# EAGLE board keyBoard_B (EAGLE 6.3), part 1 of 2
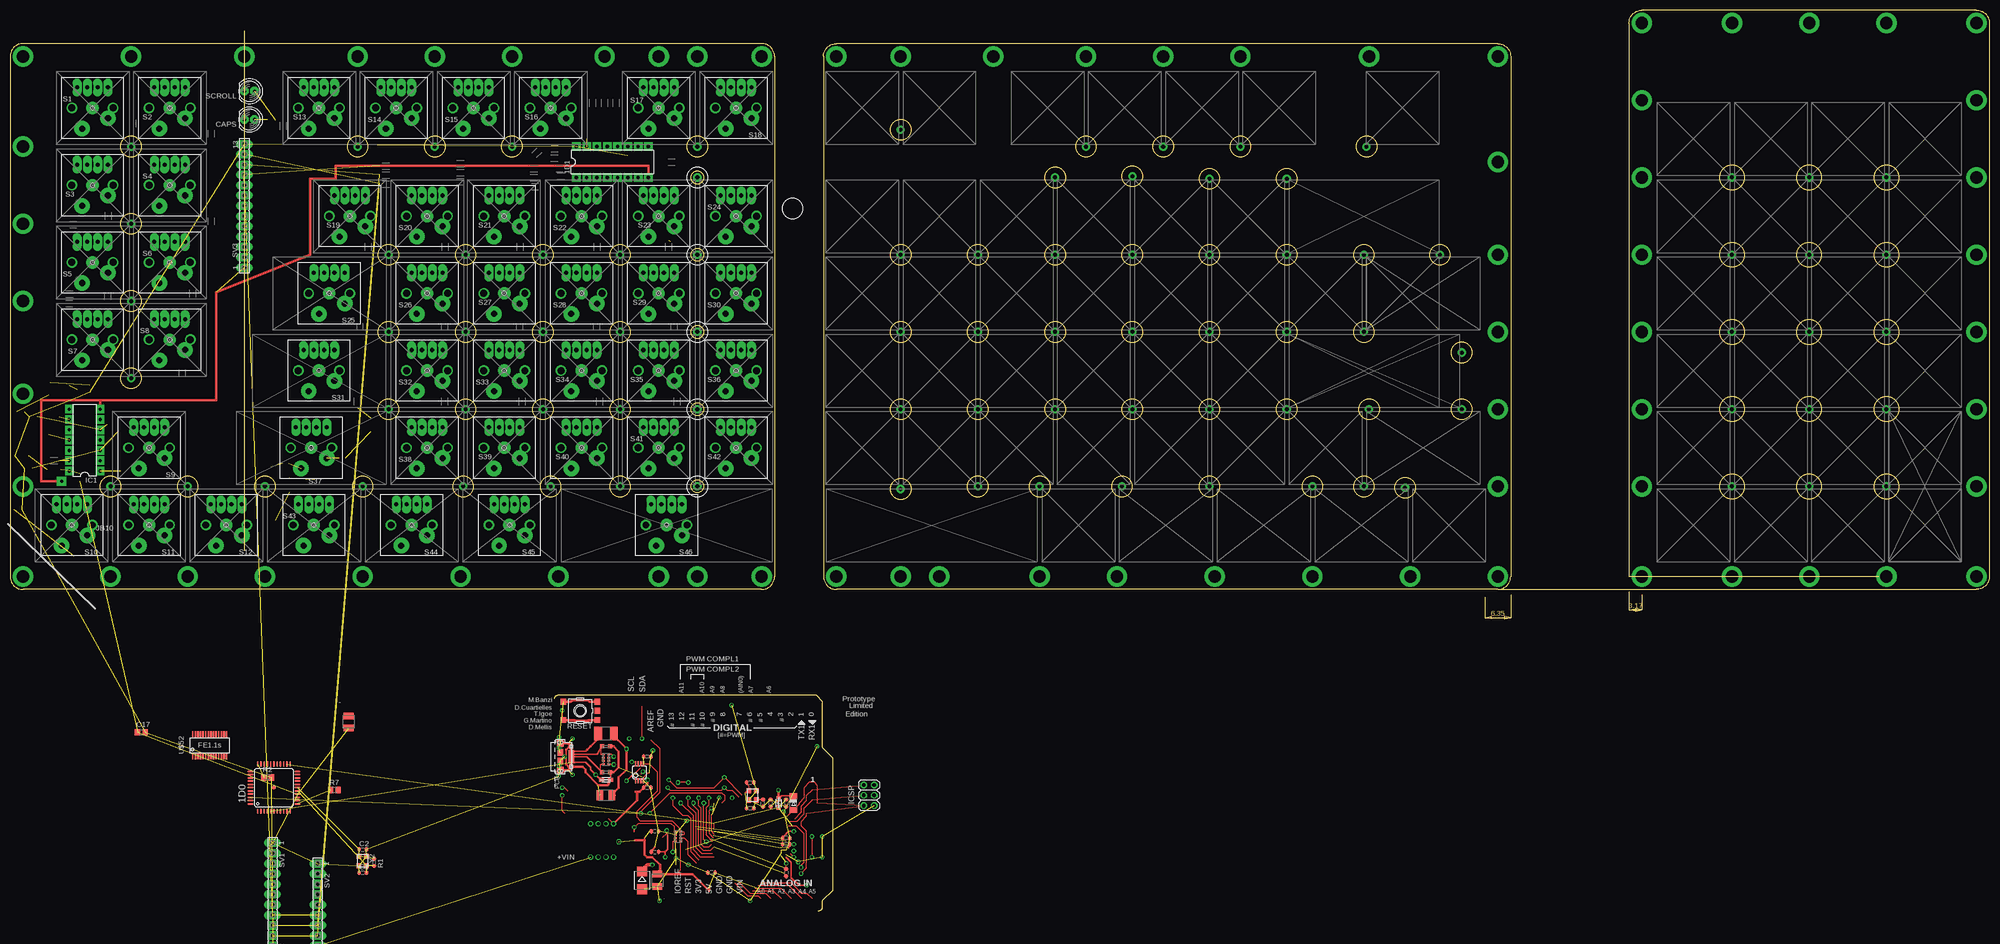
[diagram p0: board, top side]
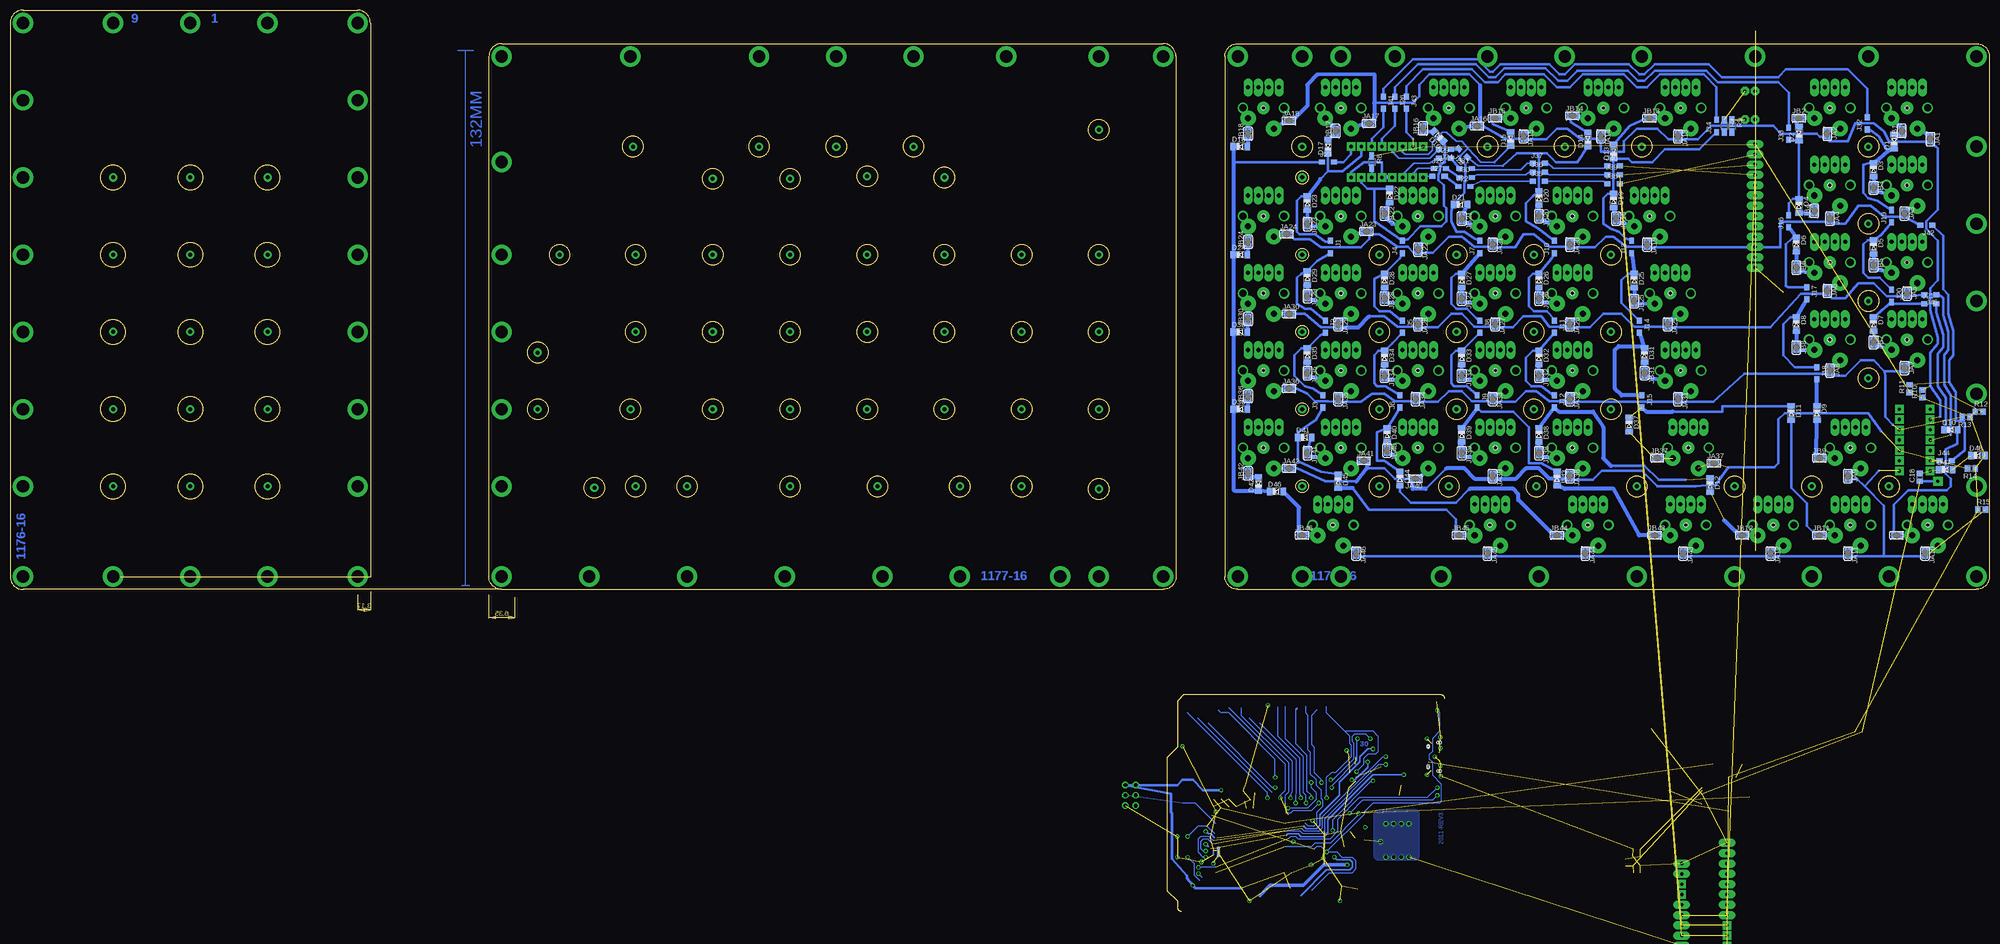
[diagram p1: board, bottom side, seen from below]

Size 488.31 x 222.25 mm. Coordinates in mm from the lower left corner, seen from the top.
Outline: 367.03,79.38 485.14,79.38 arc90 488.31,82.55 488.31,219.07 arc90 485.14,222.25 402.59,222.25 arc90 399.42,219.07 399.42,82.55 461.01,82.55
Outline: 367.03,79.38 203.84,79.38 arc-90 200.66,82.55 200.66,210.82 arc-90 203.84,214 367.03,214 arc-90 370.2,210.82 370.2,82.55 arc-90 367.03,79.38
Outline: 199.34,0 arc90 200.34,1 200.34,2.54 202.88,5.08 202.88,37.85 200.34,40.39 200.34,51.82 198.82,53.34 135.3,53.34 arc90 134.3,52.34
Outline: 57.78,217.17 57.78,88.9
Outline: 188.59,210.82 188.59,82.55 arc-90 185.42,79.38 3.17,79.38 arc-90 0,82.55 0,210.82 arc-90 3.17,214 185.42,214 arc-90 188.59,210.82
Outline: circle at 462.92,104.77 radius 3
Outline: circle at 462.92,180.97 radius 3
Outline: circle at 424.81,123.82 radius 3
Outline: circle at 443.87,123.82 radius 3
Outline: circle at 443.87,104.77 radius 3
Outline: circle at 424.81,104.77 radius 3
Outline: circle at 424.81,142.88 radius 3
Outline: circle at 424.81,161.93 radius 3
Outline: circle at 462.92,123.82 radius 3
Outline: circle at 462.92,142.88 radius 3
Outline: circle at 462.92,161.93 radius 3
Outline: circle at 443.87,161.93 radius 3
Outline: circle at 443.87,180.97 radius 3
Outline: circle at 424.81,180.97 radius 3
Outline: circle at 443.87,142.88 radius 3
Outline: circle at 219.71,161.93 radius 2.5
Outline: circle at 238.76,161.93 radius 2.5
Outline: circle at 257.81,161.93 radius 2.5
Outline: circle at 219.71,142.88 radius 2.5
Outline: circle at 238.76,142.88 radius 2.5
Copper layers (1*16): Top 0.035mm / dielectric 1.5mm / Bottom 0.035mm
Design rules "default": minimum track width 10mil, minimum drill 24mil, track to track 8mil, track to pad 8mil, pad to pad 8mil, via to via 8mil, smd to smd 8mil, copper to edge 40mil, drill to drill 8mil, minimum pad ring 10mil, minimum via ring 8mil, stop-mask expansion 4mil, vias tented up to drill 0mil, thermal gap 10mil
Net classes: 0 default: width 0.254 mm, drill 0.61 mm, clearance 0.254 mm; 1 power: width 0.254 mm, drill 0.61 mm, clearance 0.254 mm; 2 gnd: width 0.254 mm, drill 0.61 mm, clearance 0.254 mm; 3 usbvcc: width 0.254 mm, drill 0.61 mm, clearance 0.254 mm; 4 aref: width 0.254 mm, drill 0.61 mm, clearance 0.254 mm
vRestrict: area 238.8,-19.2 to 239.3,-18.9; area 232,-22.6 to 232.7,-22.1; area 240.7,-22.6 to 241.4,-22.1; area 237.5,-22.6 to 238,-22.1; area 244.1,-47.5 to 244.7,-47; area 246.6,-47.6 to 247.1,-46.7

## Footprints (pad centres in the part's own frame; a part is rotated, then mirrored left to right if it is on the bottom)
SMARTPRJ_TQFP44-PAD = smd 1.4 x 0.45: 1 -5.8,4; 2 -5.8,3.2; 3 -5.8,2.4; 4 -5.8,1.6; 5 -5.8,0.8; 6 -5.8,0; 7 -5.8,-0.8; 8 -5.8,-1.6; 9 -5.8,-2.4; 10 -5.8,-3.2; 11 -5.8,-4; 23 5.8,-4; 24 5.8,-3.2; 25 5.8,-2.4; 26 5.8,-1.6; 27 5.8,-0.8; 28 5.8,0; 29 5.8,0.8; 30 5.8,1.6; 31 5.8,2.4; 32 5.8,3.2; 33 5.8,4 | smd 0.45 x 1.4: 12 -4,-5.8; 13 -3.2,-5.8; 14 -2.4,-5.8; 15 -1.6,-5.8; 16 -0.8,-5.8; 17 0,-5.8; 18 0.8,-5.8; 19 1.6,-5.8; 20 2.4,-5.8; 21 3.2,-5.8; 22 4,-5.8; 34 4,5.8; 35 3.2,5.8; 36 2.4,5.8; 37 1.6,5.8; 38 0.8,5.8; 39 0,5.8; 40 -0.8,5.8; 41 -1.6,5.8; 42 -2.4,5.8; 43 -3.2,5.8; 44 -4,5.8 | smd 1 x 1: P$1 0,0
DIL16 = drill 0.813 pad 2.1 square: 1 -8.89,-3.81; 2 -6.35,-3.81; 3 -3.81,-3.81; 4 -1.27,-3.81; 5 1.27,-3.81; 6 3.81,-3.81; 7 6.35,-3.81; 8 8.89,-3.81; 9 8.89,3.81; 10 6.35,3.81; 11 3.81,3.81; 12 1.27,3.81; 13 -1.27,3.81; 14 -3.81,3.81; 15 -6.35,3.81; 16 -8.89,3.81
C0603-ROUND = smd 0.898 x 1.1: 1 -0.889,0; 2 0.889,0
SMC_B = smd 1.6 x 2.4: + -1.5,0; - 1.5,0
C0805 = smd 1.3 x 1.5: 1 -0.95,0; 2 0.95,0
LED5MM = drill 0.813 pad 2.1 octagon: A -1.27,0; K 1.27,0
SOD80C = smd 1.4 x 1.8 bottom: A -1.7,0; C 1.7,0
SMB = smd 2.4 x 2.4: A 2.2,0; C -2.2,0
MINIMELF = smd 1.4 x 1.8: A 1.7,0; C -1.7,0
L1812 = smd 1.9 x 3.4: 1 -1.95,0; 2 1.95,0
DIL14 = drill 0.813 pad 2.1 square: 1 -7.62,-3.81; 2 -5.08,-3.81; 3 -2.54,-3.81; 4 0,-3.81; 5 2.54,-3.81; 6 5.08,-3.81; 7 7.62,-3.81; 8 7.62,3.81; 9 5.08,3.81; 10 2.54,3.81; 11 0,3.81; 12 -2.54,3.81; 13 -5.08,3.81; 14 -7.62,3.81
MSOP08 = smd 0.3 x 1.2: 1 -0.976,-2.113; 2 -0.326,-2.113; 3 0.324,-2.113; 4 0.974,-2.113; 5 0.974,2.112; 6 0.324,2.112; 7 -0.326,2.112; 8 -0.976,2.112
2X03 = drill 0.95 pad 1.55 octagon: 1 -2.54,-1.27; 2 -2.54,1.27; 3 0,-1.27; 4 0,1.27; 5 2.54,-1.27; 6 2.54,1.27
R1206W = smd 1.5 x 1.2 bottom: 1 1.499,0; 2 -1.499,0
CON2_USB_MICRO_B_AT = smd 0.406 x 1.346: P1 -1.321,2.692; P2 -0.66,2.692; P3 0,2.692; P4 0.66,2.692; P5 1.321,2.692 | smd 1.651 x 1.549: S1 -3.302,0; S2 3.302,0 | smd 1.524 x 1.016: S3 -2.489,2.692; S4 2.489,2.692 | smd 1.524 x 1.524: S5 -1.016,0; S6 1.016,0 | hole 0.7: -3.505,0.254; -3.505,-0.254; 3.505,0.254; 3.505,-0.254; -2.616,2.692; -2.362,2.692; 2.362,2.692; 2.616,2.692
SJ = smd 1.168 x 1.6 bottom: 1 0.762,0; 2 -0.762,0
SJ' = smd 1.168 x 1.6: 1 -0.762,0; 2 0.762,0
0805 = smd 1.2 x 1: 1 -1.1,0; 2 1.1,0
R0603-ROUND = smd 0.898 x 1.1: 1 -0.889,0; 2 0.889,0
M0805 = smd 1.3 x 1.6: 1 -0.95,0; 2 0.95,0
R1206W' = smd 1.8 x 1.2: 1 -1.499,0; 2 1.499,0
R0402 = smd 0.7 x 0.9: 1 -0.65,0; 2 0.65,0
TS42 = smd 1.6 x 1.4: 1 -4.2,2.25; 2 4.2,2.25; 3 -4.2,-2.25; 4 4.2,-2.25; 5 -4.2,0
CAY16 = smd 0.5 x 0.65: 1 -1.2,-0.675; 2 -0.4,-0.675; 3 0.4,-0.675; 4 1.2,-0.675; 5 1.2,0.675; 6 0.4,0.675; 7 -0.4,0.675; 8 -1.2,0.675
CHERRY-MX-4P = drill 1.016 pad 2.184 long: D1 -3.81,-5.08; D2 3.81,-5.08; LED1 -1.27,-5.08; LED2 1.27,-5.08 | drill 1 pad 3: P$1 0,0 | drill 1.714 pad 1.93: P$3 -5.08,0; P$4 5.08,0 | drill 1.5 pad 3.81: SW1 -3.81,2.54; SW2 2.54,5.08 | hole 1: 0,0
FE12 = drill 0.813 pad 2.1 long: 1 -13.97,0; 2 -11.43,0; 3 -8.89,0; 4 -6.35,0; 5 -3.81,0; 6 -1.27,0; 7 1.27,0; 8 3.81,0 | drill 0.813 pad 2.1 square: 9 6.35,0; 10 8.89,0; 11 11.43,0
FE09 = drill 0.813 pad 2.1 long: 1 -10.16,0; 2 -7.62,0; 5 0,0; 6 2.54,0; 7 5.08,0; 8 7.62,0; 9 10.16,0 | drill 0.813 pad 2.1 square: 3 -5.08,0; 4 -2.54,0
FE13 = drill 0.813 pad 2.1 long: 1 -15.24,0; 2 -12.7,0; 3 -10.16,0; 4 -7.62,0; 5 -5.08,0; 6 -2.54,0; 7 0,0; 8 2.54,0; 9 5.08,0; 10 7.62,0; 11 10.16,0; 12 12.7,0; 13 15.24,0
FE1.1S_SSOP-28 = smd 0.35 x 1.5: 1 -4.16,-2.7; 2 -3.52,-2.7; 3 -2.88,-2.7; 4 -2.24,-2.7; 5 -1.6,-2.7; 6 -0.96,-2.7; 7 -0.32,-2.7; 8 0.32,-2.7; 9 0.96,-2.7; 10 1.6,-2.7; 11 2.24,-2.7; 12 2.88,-2.7; 13 3.52,-2.7; 14 4.16,-2.7; 15 4.16,2.7; 16 3.52,2.7; 17 2.88,2.7; 18 2.24,2.7; 19 1.6,2.7; 20 0.96,2.7; 21 0.32,2.7; 22 -0.3,2.7; 23 -0.96,2.7; 24 -1.6,2.7; 25 -2.24,2.7; 26 -2.88,2.7; 27 -3.52,2.7; 28 -4.16,2.7
CRYSTAL-3.2-2.5 = smd 1.3 x 1.05: 1 -1.15,-0.925; 2 1.15,-0.925; 3 1.15,0.925; 4 -1.15,0.925
CT/CN0603 = smd 1 x 1: 1 -1,0; 2 1,0

## Placement (x,y rotation side)
1D0  ATMEGA32U4  [SMARTPRJ_TQFP44-PAD]  65.09,30.48 90 top
1D1  74HC138N  [DIL16]  148.59,184.78 0 top
C1  22p  [C0603-ROUND]  87,9.52 0 top
C2  22p  [C0603-ROUND]  87,15.24 0 top
C3  100n  [C0603-ROUND]  187.64,26.67 90 top
C4  100n  [C0603-ROUND]  173.04,9.52 180 top
C5  1uF  [C0603-ROUND]  191.45,26.67 270 top
C6  100n  [C0603-ROUND]  191.45,9.52 270 top
C7  1uF  [C0603-ROUND]  191.45,16.51 0 top
C8  10u  [SMC_B]  147,28.57 180 top
C9  100n  [C0603-ROUND]  191.45,18.03 180 top
C10  10u  [SMC_B]  83.5,46.67 270 top
C11  1u  [C0603-ROUND]  159.07,19.69 180 top
C12  10u  [SMC_B]  159.7,7.62 270 top
C13  100n  [C0603-ROUND]  157.16,30.48 0 top
C14  1u  [C0603-ROUND]  159.07,14.61 0 top
C15  22p  [C0603-ROUND]  185.74,26.67 90 top
C16  22p  [C0603-ROUND]  182.56,31.75 0 top
C17  100n  [C0805]  32.38,44.13 0 top
C18  100n  [C0805]  17.14,107 90 bottom
C22  100n  [C0603-ROUND]  157.16,38.1 180 top
CAPS  [LED5MM]  59.05,195.26 180 top
D1  LL4148  [SOD80C]  23.5,189.86 270 top
D2  LL4148  [SOD80C]  46.99,191.77 270 top
D3  LL4148  [SOD80C]  28.57,182.88 90 top
D4  LL4148  [SOD80C]  46.99,173.99 90 top
D5  LL4148  [SOD80C]  28.57,163.83 90 top
D6  LL4148  [SOD80C]  47.62,164.46 90 top
D7  LL4148  [SOD80C]  28.57,144.78 90 top
D8  LL4148  [SOD80C]  47.62,144.78 90 top
D9  LL4148  [SOD80C]  42.55,122.87 90 top
D10  LL4148  [SOD80C]  9.53,118.75 0 top
D11  LL4148  [SOD80C]  48.9,122.87 90 top
D12  LL4148  [SOD80C]  68.9,105.09 90 top
D13  LL4148  [SOD80C]  92.71,187.32 270 top
D14  LL4148  [SOD80C]  99.06,190.34 270 top
D15  LL4148  [SOD80C]  118.11,190.5 270 top
D16  LL4148  [SOD80C]  135.89,191.13 225 top
D17  LL4148  [SOD80C]  163.19,188.59 270 top
D18  LL4148  [SOD80C]  184.78,188.59 0 top
D19  LL4148  [SOD80C]  92.71,175.26 90 top
D20  LL4148  [SOD80C]  111.12,175.89 90 top
D21  LL4148  [SOD80C]  130.49,174.31 0 top
D22  LL4148  [SOD80C]  147.96,176.53 90 top
D23  LL4148  [SOD80C]  168.28,174.62 90 top
D24  LL4148  [SOD80C]  184.78,161.93 0 top
D25  LL4148  [SOD80C]  87.63,155.57 90 top
D26  LL4148  [SOD80C]  111.12,155.57 90 top
D27  LL4148  [SOD80C]  130.18,155.57 90 top
D28  LL4148  [SOD80C]  149.22,155.57 90 top
D29  LL4148  [SOD80C]  168.28,156.21 90 top
D30  LL4148  [SOD80C]  184.78,142.88 0 top
D31  LL4148  [SOD80C]  85.09,137.16 90 top
D32  LL4148  [SOD80C]  111.12,136.52 90 top
D33  LL4148  [SOD80C]  130.18,136.52 90 top
D34  LL4148  [SOD80C]  149.22,136.52 90 top
D35  LL4148  [SOD80C]  168.28,137.16 90 top
D36  LL4148  [SOD80C]  184.78,123.82 0 top
D37  LL4148  [SOD80C]  88.9,120.01 90 top
D38  LL4148  [SOD80C]  111.12,117.47 90 top
D39  LL4148  [SOD80C]  130.18,117.47 90 top
D40  LL4148  [SOD80C]  148.59,117.47 90 top
D41  LL4148  [SOD80C]  168.91,116.84 0 top
D42  LL4148  [SOD80C]  180.34,105.41 270 top
D43  LL4148  [SOD80C]  106.68,106.68 90 top
D44  LL4148  [SOD80C]  145.41,106.68 90 top
D45  LL4148  [SOD80C]  160.66,106.05 90 top
D46  LL4148  [SOD80C]  175.9,103.5 0 top
D47  LL4148  [SOD80C]  10.79,108.9 0 top
D48  LL4148  [SOD80C]  2.86,112.39 0 top
D90  M7  [SMB]  155.89,7.62 270 top
D91  CD1206-S01575  [MINIMELF]  193.23,26.67 270 top
F1  MF-MSMF050-2 500mA  [L1812]  147,43.81 180 top
IC1  74HC04N  [DIL14]  18.41,116.2 90 top
IC2  LMV358IDGKR  [MSOP08]  155.26,34.29 0 top
ICSP  ICSP  [2X03]  211.9,28.57 270 top
J1  J  [R1206W]  162.56,163.83 90 top
J2  J  [R1206W]  163.83,144.14 90 top
J3  J  [R1206W]  164.47,125.73 270 top
J4  J  [R1206W]  144.78,163.83 270 top
J5  J  [R1206W]  144.78,144.14 90 top
J6  J  [R1206W]  145.41,125.73 270 top
J7  J  [R1206W]  125.73,163.83 270 top
J8  J  [R1206W]  125.73,144.14 90 top
J9  J  [R1206W]  126.36,125.73 90 top
J10  J  [R1206W]  107.31,163.83 270 top
J11  J  [R1206W]  107.31,144.14 90 top
J12  J  [R1206W]  107.31,125.73 90 top
J13  J  [R1206W]  88.27,163.83 270 top
J14  J  [R1206W]  86.36,144.14 90 top
J15  J  [R1206W]  85.72,125.73 90 top
J16  J  [R1206W]  49.53,170.18 270 top
J17  J  [R1206W]  45.09,152.4 90 top
J18  J  [R1206W]  42.55,132.71 90 top
J19  J  [R1206W]  24.13,171.45 270 top
J20  J  [R1206W]  24.13,151.76 90 top
J21  J  [R1206W]  14.61,149.86 0 top
J22  J  [R1206W]  129.54,178.75 0 top
J23  J  [R1206W]  163.19,184.78 0 top
J24  J  [R1206W]  134.3,187.96 180 top
J25  J  [R1206W]  129.86,187.01 225 top
J26  J  [R1206W]  146.69,199.39 90 top
J27  J  [R1206W]  135.89,181.29 0 top
J28  J  [R1206W]  135.57,183.2 0 top
J29  J  [R1206W]  134.3,185.74 0 top
J30  J  [R1206W]  129.22,180.97 0 top
J31  J  [R1206W]  129.22,183.2 0 top
J32  J  [R1206W]  30.16,194.31 270 top
J33  J  [R1206W]  49.53,191.77 270 top
J34  J  [R1206W]  67.31,193.67 270 top
J35  J  [R1206W]  111.12,180.02 0 top
J36  J  [R1206W]  111.12,182.25 0 top
J37  J  [R1206W]  111.12,184.47 0 top
J38  J  [R1206W]  92.71,179.39 0 top
J39  J  [R1206W]  92.71,181.61 0 top
J40  J  [R1206W]  92.71,183.83 0 top
J41  J  [R1206W]  149.54,199.39 90 top
J42  J  [R1206W]  15.56,169.23 180 top
J43  J  [R1206W]  143.83,199.39 90 top
J44  J  [R1206W]  10.79,111.12 0 top
J45  J  [R1206W]  14.61,152.08 180 top
J47  USB MICRO  [CON2_USB_MICRO_B_AT]  135.75,38.1 270 top
JA1  [SJ]  14.61,190.5 90 top
JA2  [SJ]  40.01,191.77 90 top
JA3  [SJ]  20.95,172.08 90 top
JA4  [SJ]  39.37,170.81 90 top
JA5  [SJ]  20.32,152.4 90 top
JA6  [SJ]  40.01,153.03 90 top
JA7  [SJ]  20.95,133.99 90 top
JA8  [SJ]  39.37,133.35 90 top
JA9  [SJ]  34.92,107.31 90 top
JA10  [SJ]  15.88,88.26 90 top
JA11  [SJ]  34.92,88.26 90 top
JA12  [SJ]  53.98,88.26 90 top
JA13  [SJ]  76.83,191.13 90 top
JA14  [SJ]  95.89,191.13 90 top
JA15  [SJ]  114.94,191.13 90 top
JA16  [SJ]  126.36,193.67 0 top
JA17  [SJ]  153.03,194.31 0 top
JA18  [SJ]  172.72,194.94 0 top
JA19  [SJ]  84.45,164.46 90 top
JA20  [SJ]  103.5,164.46 90 top
JA21  [SJ]  122.56,164.46 90 top
JA22  [SJ]  140.97,163.19 90 top
JA23  [SJ]  153.67,167.64 0 top
JA24  [SJ]  173.35,167 0 top
JA25  [SJ]  79.38,144.78 90 top
JA26  [SJ]  103.5,144.78 90 top
JA27  [SJ]  121.92,144.78 90 top
JA28  [SJ]  140.97,144.78 90 top
JA29  [SJ]  160.66,144.78 90 top
JA30  [SJ]  172.72,147.32 0 top
JA31  [SJ]  76.83,126.37 90 top
JA32  [SJ]  103.5,126.37 90 top
JA33  [SJ]  122.56,126.37 90 top
JA34  [SJ]  141.6,126.37 90 top
JA35  [SJ]  160.66,126.37 90 top
JA36  [SJ]  172.72,128.9 0 top
JA37  [SJ]  67.94,110.49 0 top
JA38  [SJ]  103.5,107.31 90 top
JA39  [SJ]  122.56,107.31 90 top
JA40  [SJ]  141.6,106.68 180 top
JA41  [SJ]  154.31,111.12 0 top
JA42  [SJ]  172.72,109.22 0 top
JA43  [SJ]  75.56,88.26 90 top
JA44  [SJ]  99.69,88.26 90 top
JA45  [SJ]  123.83,88.26 90 top
JA46  [SJ]  156.21,88.26 90 top
JB1  [SJ]  21.59,192.41 270 top
JB2  [SJ']  46.99,195.58 0 bottom
JB3  [SJ]  28.57,178.44 90 top
JB4  [SJ]  43.18,172.72 270 top
JB5  [SJ']  28.57,159.38 270 bottom
JB6  [SJ]  47.62,158.75 90 top
JB7  [SJ]  28.57,140.33 90 top
JB8  [SJ]  47.62,139.06 90 top
JB9  [SJ]  41.91,111.76 0 top
JB10  [SJ]  22.86,92.71 0 top
JB11  [SJ]  41.91,92.71 0 top
JB12  [SJ]  60.96,92.71 0 top
JB13  [SJ]  83.82,195.58 0 top
JB14  [SJ']  102.87,196.22 0 bottom
JB15  [SJ']  121.92,195.58 0 bottom
JB16  [SJ]  139.7,193.04 270 top
JB17  [SJ]  161.29,192.41 270 top
JB18  [SJ]  182.88,191.77 270 top
JB19  [SJ]  92.08,170.81 90 top
JB20  [SJ]  111.12,171.45 90 top
JB21  [SJ]  130.18,170.81 90 top
JB22  [SJ]  149.22,172.08 90 top
JB23  [SJ]  168.28,169.55 90 top
JB24  [SJ]  182.88,165.1 270 top
JB25  [SJ]  87.63,150.5 90 top
JB26  [SJ]  111.12,151.13 90 top
JB27  [SJ]  130.18,151.13 90 top
JB28  [SJ]  149.22,151.13 90 top
JB29  [SJ]  168.28,151.76 90 top
JB30  [SJ]  182.88,146.05 270 top
JB31  [SJ]  85.09,132.71 90 top
JB32  [SJ]  111.12,132.08 90 top
JB33  [SJ]  130.18,132.08 90 top
JB34  [SJ]  149.22,132.08 90 top
JB35  [SJ]  168.28,132.71 90 top
JB36  [SJ]  182.88,127 270 top
JB37  [SJ]  81.92,111.76 0 top
JB38  [SJ]  111.12,113.03 90 top
JB39  [SJ]  130.18,113.03 90 top
JB40  [SJ]  148.59,113.66 90 top
JB41  [SJ]  168.28,113.03 90 top
JB42  [SJ]  182.88,107.95 270 top
JB43  [SJ]  82.55,92.71 0 top
JB44  [SJ]  106.68,92.71 0 top
JB45  [SJ]  130.81,92.71 0 top
JB46  [SJ]  169.54,92.71 0 top
L1  MH2029-300Y  [0805]  189.55,26.67 270 top
L2  MH2029-300Y  [0805]  147,32.38 0 top
R1  1M  [R0603-ROUND]  89.85,12.06 270 top
R2  [M0805]  63.5,33.02 0 top
R3  [R1206W']  65.41,193.67 270 bottom
R4  1M  [R0603-ROUND]  182.56,25.4 0 top
R5  NM  [R0402]  190.18,14.33 90 bottom
R6  NM  [R0402]  190.18,14.96 90 bottom
R7  [M0805]  80.01,29.84 0 top
R8  [R1206W']  152.4,184.78 270 bottom
R9  [R1206W']  63.5,193.67 270 bottom
R10  [M0805]  16.51,127.63 90 bottom
R11  [M0805]  19.68,128.9 90 bottom
R12  [M0805]  2.54,123.19 0 bottom
R13  [M0805]  5.71,121.92 180 bottom
R14  [M0805]  4.45,109.22 180 bottom
R15  [M0805]  1.91,99.06 0 bottom
RESET  TS42  [TS42]  140.65,49.4 180 top
RN1  10K  [CAY16]  164.78,18.41 270 top
RN3  22R  [CAY16]  147,37.46 90 top
S1  Scroll Lock  [CHERRY-MX-4P]  20.32,198.12 180 top
S2  ESC  [CHERRY-MX-4P]  39.37,198.12 180 top
S3  Ins  [CHERRY-MX-4P]  20.32,179.07 180 top
S4  Pause  [CHERRY-MX-4P]  39.37,179.07 180 top
S5  Home  [CHERRY-MX-4P]  20.32,160.02 180 top
S6  PageUp  [CHERRY-MX-4P]  39.37,160.02 180 top
S7  End  [CHERRY-MX-4P]  20.32,140.97 180 top
S8  PageDown  [CHERRY-MX-4P]  39.37,140.97 180 top
S9  Up  [CHERRY-MX-4P]  34.29,114.3 180 top
S10  Left  [CHERRY-MX-4P]  15.24,95.25 180 top
S11  Down  [CHERRY-MX-4P]  34.29,95.25 180 top
S12  Right  [CHERRY-MX-4P]  53.34,95.25 180 top
S13  F1  [CHERRY-MX-4P]  76.2,198.12 180 top
S14  F2  [CHERRY-MX-4P]  95.25,198.12 180 top
S15  F3  [CHERRY-MX-4P]  114.3,198.12 180 top
S16  F4  [CHERRY-MX-4P]  133.35,198.12 180 top
S17  F5  [CHERRY-MX-4P]  160.02,198.12 180 top
S18  F6  [CHERRY-MX-4P]  179.07,198.12 180 top
S19  1  [CHERRY-MX-4P]  83.82,171.45 180 top
S20  2  [CHERRY-MX-4P]  102.87,171.45 180 top
S21  3  [CHERRY-MX-4P]  121.92,171.45 180 top
S22  4  [CHERRY-MX-4P]  140.97,171.45 180 top
S23  5  [CHERRY-MX-4P]  160.02,171.45 180 top
S24  6  [CHERRY-MX-4P]  179.07,171.45 180 top
S25  TAB  [CHERRY-MX-4P]  78.74,152.4 180 top
S26  Q  [CHERRY-MX-4P]  102.87,152.4 180 top
S27  W  [CHERRY-MX-4P]  121.92,152.4 180 top
S28  E  [CHERRY-MX-4P]  140.97,152.4 180 top
S29  R  [CHERRY-MX-4P]  160.02,152.4 180 top
S30  T  [CHERRY-MX-4P]  179.07,152.4 180 top
S31  LCtrl  [CHERRY-MX-4P]  76.2,133.35 180 top
S32  A  [CHERRY-MX-4P]  102.87,133.35 180 top
S33  S  [CHERRY-MX-4P]  121.92,133.35 180 top
S34  D  [CHERRY-MX-4P]  140.97,133.35 180 top
S35  F  [CHERRY-MX-4P]  160.02,133.35 180 top
S36  G  [CHERRY-MX-4P]  179.07,133.35 180 top
S37  L Shift  [CHERRY-MX-4P]  74.3,114.3 180 top
S38  Z  [CHERRY-MX-4P]  102.87,114.3 180 top
S39  X  [CHERRY-MX-4P]  121.92,114.3 180 top
S40  C  [CHERRY-MX-4P]  140.97,114.3 180 top
S41  V  [CHERRY-MX-4P]  160.02,114.3 180 top
S42  B  [CHERRY-MX-4P]  179.07,114.3 180 top
S43  Caps Lock  [CHERRY-MX-4P]  74.93,95.25 180 top
S44  F1  [CHERRY-MX-4P]  99.06,95.25 180 top
S45  L_Alt  [CHERRY-MX-4P]  123.19,95.25 180 top
S46  Space  [CHERRY-MX-4P]  161.93,95.25 180 top
SCROLL  [LED5MM]  59.05,202.25 180 top
SV1  [FE12]  64.77,2.86 270 top
SV2  CON_KB_N  [FE09]  75.88,1.59 270 top
SV3  [FE13]  57.78,173.99 90 top
U$1  [18X18]  19.05,199.39 0 top
U$2  [18X18]  38.1,199.39 0 top
U$3  [18X18]  19.05,180.34 0 top
U$4  [18X18]  19.05,161.29 0 top
U$5  [18X18]  38.1,180.34 0 top
U$6  [18X18]  19.05,142.24 0 top
U$7  [18X18]  38.1,161.29 0 top
U$8  [18X18]  38.1,142.24 0 top
U$9  [18X18]  52.07,96.52 0 top
U$10  [18X18]  33.02,93.98 90 top
U$11  [18X18]  33.02,113.03 90 top
U$12  [18X18]  120.65,113.03 90 top
U$13  [18X18]  13.97,93.98 90 top
U$15  [18X23]  99.06,95.25 0 top
U$16  [18X23]  123.19,95.25 0 top
U$17  [18X52]  161.93,95.25 0 top
U$18  [18X18]  101.6,115.57 0 top
U$19  [18X18]  177.8,115.57 0 top
U$20  [18X18]  158.75,115.57 0 top
U$21  [18X18]  139.7,115.57 0 top
U$22  [18X37]  74.3,114.3 0 top
U$23  [18X18]  120.65,132.08 90 top
U$24  [18X18]  101.6,134.62 0 top
U$25  [18X18]  177.8,134.62 0 top
U$26  [18X18]  158.75,134.62 0 top
U$27  [18X18]  139.7,134.62 0 top
U$28  [18X33]  76.2,133.35 0 top
U$29  [18X18]  120.65,151.13 90 top
U$30  [18X18]  101.6,153.67 0 top
U$31  [18X18]  177.8,153.67 0 top
U$32  [18X18]  158.75,153.67 0 top
U$33  [18X18]  139.7,153.67 0 top
U$34  [18X28]  78.74,152.4 0 top
U$35  [18X18]  120.65,170.18 90 top
U$36  [18X18]  101.6,172.72 0 top
U$37  [18X18]  177.8,172.72 0 top
U$38  [18X18]  158.75,172.72 0 top
U$39  [18X18]  139.7,172.72 0 top
U$40  [18X18]  82.55,172.72 0 top
U$41  [18X18]  177.8,199.39 0 top
U$42  [18X18]  158.75,199.39 0 top
U$43  [18X18]  113.03,199.39 0 top
U$44  [18X18]  132.08,199.39 0 top
U$45  [18X18]  93.98,199.39 0 top
U$46  [18X18]  74.93,199.39 0 top
U$52  FE1.1S  [FE1.1S_SSOP-28]  49.21,40.96 0 top
U$81  [18X18]  414.02,191.77 0 top
U$82  [18X18]  433.07,191.77 0 top
U$88  [18X18]  208.91,199.39 0 top
U$91  [18X23]  74.93,95.25 0 top
U$93  [18X18]  227.97,199.39 0 top
U$94  [18X18]  292.74,199.39 0 top
U$95  [18X18]  254.63,199.39 0 top
U$96  [18X18]  273.69,199.39 0 top
U$97  [18X18]  311.79,199.39 0 top
U$98  [18X18]  208.91,172.72 0 top
U$99  [18X18]  227.97,172.72 0 top
U$100  [18X18]  247.01,172.72 0 top
U$101  [18X18]  266.06,172.72 0 top
U$102  [18X18]  285.12,172.72 0 top
U$103  [18X18]  304.17,172.72 0 top
U$104  [18X18]  208.91,153.67 0 top
U$105  [18X18]  227.97,153.67 0 top
U$106  [18X18]  247.01,153.67 0 top
U$107  [18X18]  266.06,153.67 0 top
U$108  [18X18]  285.12,153.67 0 top
U$109  [18X18]  304.17,153.67 0 top
U$110  [18X18]  323.21,153.67 0 top
U$111  [18X18]  342.26,153.67 0 top
U$113  [18X18]  208.91,134.62 0 top
U$119  [18X18]  452.12,191.77 0 top
U$120  [18X18]  471.17,191.77 0 top
U$121  [18X18]  471.17,172.72 0 top
U$122  [18X18]  452.12,172.72 0 top
U$123  [18X18]  433.07,172.72 0 top
U$124  [18X18]  414.02,172.72 0 top
U$125  [18X18]  414.02,153.67 0 top
U$126  [18X18]  433.07,153.67 0 top
U$127  [18X18]  452.12,153.67 0 top
U$128  [18X18]  471.17,153.67 0 top
U$129  [18X18]  414.02,134.62 0 top
U$130  [18X18]  433.07,134.62 0 top
U$131  [18X18]  452.12,134.62 0 top
U$132  [18X18]  471.17,134.62 0 top
U$133  [18X18]  414.02,115.57 0 top
U$134  [18X18]  433.07,115.57 0 top
U$135  [18X18]  452.12,115.57 0 top
U$136  [18X18]  471.17,115.57 0 top
U$137  [18X18]  414.02,96.52 0 top
U$138  [18X18]  433.07,96.52 0 top
U$139  [18X18]  452.12,96.52 0 top
U$140  [37X18]  472.44,104.77 0 top
U$141  [18X18]  471.17,96.52 0 top
U$142  [KEY]  455.93,114.3 0 top
U$143  [KEY]  455.93,95.25 0 top
U$144  [KEY]  436.88,114.3 0 top
U$145  [KEY]  436.88,95.25 0 top
U$146  [KEY]  417.83,95.25 0 top
U$147  [KEY]  417.83,114.3 0 top
U$148  [KEY]  455.93,133.35 0 top
U$149  [NUMENTER]  474.98,104.77 0 top
U$150  [KEY]  436.88,133.35 0 top
U$151  [KEY]  417.83,133.35 0 top
U$152  [KEY]  474.98,133.35 0 top
U$153  [KEY]  474.98,152.4 0 top
U$154  [KEY]  455.93,152.4 0 top
U$155  [KEY]  436.88,152.4 0 top
U$156  [KEY]  417.83,152.4 0 top
U$157  [KEY]  417.83,171.45 0 top
U$158  [KEY]  436.88,171.45 0 top
U$159  [KEY]  455.93,171.45 0 top
U$160  [KEY]  474.98,171.45 0 top
U$161  [KEY]  474.98,190.5 0 top
U$162  [KEY]  455.93,190.5 0 top
U$163  [KEY]  436.88,190.5 0 top
U$164  [KEY]  417.83,190.5 0 top
U$166  [18X18]  227.97,134.62 0 top
U$167  [18X18]  247.01,134.62 0 top
U$168  [18X18]  266.06,134.62 0 top
U$169  [18X18]  285.12,134.62 0 top
U$170  [18X18]  304.17,134.62 0 top
U$171  [18X18]  208.91,115.57 0 top
U$172  [18X18]  227.97,115.57 0 top
U$173  [18X18]  247.01,115.57 0 top
U$174  [18X18]  266.06,115.57 0 top
U$175  [18X18]  285.12,115.57 0 top
U$176  [18X18]  304.17,115.57 0 top
U$177  [18X52]  227.33,95.25 0 top
U$178  [18X37]  334.01,171.45 0 top
U$179  [18X18]  353.69,96.52 0 top
U$180  [18X23]  333.38,95.25 0 top
U$181  [18X23]  309.25,95.25 0 top
U$182  [18X23]  285.12,95.25 0 top
U$183  [18X37]  334.01,133.35 0 top
U$184  [18X18]  342.26,199.39 0 top
U$185  [18X18]  323.21,115.57 0 top
U$186  [SIZE132]  375.92,148.27 0 top
U$187  [18X42]  336.55,133.35 0 top
U$188  [18X18]  262.25,96.52 0 top
U$189  [18X28]  348.62,114.3 0 top
U$190  [18X28]  348.62,152.4 0 top
Y1  16MHz KX-7  [CRYSTAL-3.2-2.5]  183.2,28.57 270 top
Y2  16MHz KX-7  [CRYSTAL-3.2-2.5]  87,12.38 270 top
Z1  CG0603MLC-05E  [CT/CN0603]  147,34.29 0 top
Z2  CG0603MLC-05E  [CT/CN0603]  147,40.64 0 top

## Library data of the parts
1D0 1D1 CAPS IC1 J1-J45 JA1-JA12 JA43 JB4 JB6-JB13 JB16 JB17 SCROLL = detali_main
C1-C7 C9 C11 C13-C16 C22 ICSP J47 R1 R4-R6 RESET Y1 Y2 = SmartPrj
C8 C10 C12 C17 C18 F1 R2 R3 R7-R15 = rcl
D1-D48 JA13-JA42 JA44-JA46 JB1 JB3 JB18-JB46 = detali
D90 D91 = diode
IC2 = linear
JB2 JB5 JB14 JB15 = jumper
L1 L2 = wuerth-elektronik
RN1 RN3 = resistor-dil
S1-S46 = cherrymx
SV1-SV3 = detali_main; OC_FARNELL: unknown; OC_NEWARK: unknown
U$1-U$13 U$15-U$46 U$81 U$82 U$88 U$91 U$93-U$111 U$113 U$119-U$141 U$166-U$185 U$187-U$190 = kbmx
U$52 = imcom
U$142-U$164 U$186 = kbmxco
Z1 Z2 = varistor

## Nets
1: D1.C D3.C J19.2 J32.1
1J: D5.C J19.1 J20.1
1J2: D7.C J20.2 J21.1
1J3: D10.C J21.2
2: D2.C D4.C J16.2 J33.1
2J: D6.C J16.1 J17.1
2J2: D8.C J17.2 J18.1
2J3: D9.C J18.2
3: D13.C D19.C J13.2 J34.1
3J: D25.C J13.1 J14.1
3J2: D31.C J14.2 J15.1
3J3: D11.C D37.C J15.2
4: D14.C D20.C J10.2 J25.1
4J: D26.C J10.1 J11.1
4J2: D32.C J11.2 J12.1
4J3: D12.C D38.C J12.2
5: 1D1.14 D15.C D21.C J7.2
5-GND: RESET.5
5J: D27.C J7.1 J8.1
5J2: D33.C J8.2 J9.1
5J3: D39.C D43.C J9.2
6: 1D1.7 D16.C D22.C J4.2
6J: D28.C J4.1 J5.1
6J2: D34.C J5.2 J6.2
6J3: D40.C D44.C J6.1
7: D29.C J1.2 J2.1
7J: 1D1.10 D17.C D23.C J1.1
7J2: D35.C J2.2 J3.2
7J3: D41.C D45.C J3.1
8: D18.C D24.C D30.C D36.C D42.C D46.C J23.1
+3V3: C14.2
+5V: 1D1.16 C3.1 C4.1 C11.2 C12.+ C13.1 C17.2 CAPS.K D48.A D91.C IC2.8 ICSP.2 L1.1 R2.2 R8.1 R10.1 R11.1 R12.1 R13.1 R14.1 R15.1 RN1.5 SCROLL.K SV1.11 SV2.9 SV3.13
AGND: C6.1 R5.1
AREF [aref]: 1D0.42 C6.2
AVCC: 1D0.24 C5.1 L1.2
AVCC1: 1D0.44
CMP: C22.2 RN1.7 RN1.8
D1: J38.2 SV1.10 SV2.8 SV3.12
D2: J39.2 SV1.9 SV2.7 SV3.11
D3: J40.2 SV1.8 SV2.6 SV3.10
D+: J47.P3 RN3.8 Z1.1
D-: J47.P2 RN3.5 Z2.1
GND: 1D0.15 1D1.4 1D1.5 1D1.8 C1.1 C2.2 C3.2 C4.2 C5.2 C8.- C9.1 C10.- C11.1 C12.- C13.2 C14.1 C15.1 C16.2 C17.1 C18.1 C22.1 D90.A IC1.7 IC2.4 ICSP.6 J47.S1 J47.S2 J47.S3 J47.S4 J47.S5 J47.S6 L2.2 R5.2 R6.1 RESET.3 RESET.4 RN1.2 RN1.3 SV1.1 SV2.1 SV3.1 Y1.2 Y1.4 Y2.2 Y2.4 Z1.2 Z2.2
GND1: 1D0.23
GND2: 1D0.35
GND3: 1D0.43
HWB: RN1.6
KBB1: SV1.2
KBB2: SV1.3
KBB3: SV1.4
KBB4: SV1.5
KBB5: SV1.6
KBB6: SV1.7
KBN1: SV2.2
KBN2: SV2.3
KBN3: SV2.5
L1: IC1.9 JA1.2 JA2.2 JA13.2 JA14.2 JA15.2 JA16.2 JA17.2 JA18.2 R10.2
L2: J42.2 JA3.2 JA4.2 JA19.2 JA20.2 JA21.2 JA22.2 JA23.2 JA24.2
L3: J45.2 JA5.2 JA6.2 JA25.2 JA26.2 JA27.2 JA28.2 JA29.2 JA30.2
L4: IC1.5 JA7.2 JA8.2 JA31.2 JA32.2 JA33.2 JA34.2 JA35.2 JA36.2 R13.2
L5: IC1.3 JA37.2 JA38.2 JA39.2 JA40.2 JA41.2 JA42.2 R14.2
L6: IC1.1 JA9.2 JA10.2 JA11.2 JA12.2 JA43.2 JA44.2 JA45.2 JA46.2 R15.2
LED_CAPS: R9.2
LED_NUM: SV2.4
LED_SCROLL: R3.2
MISO: ICSP.1
MOSI: ICSP.4
N$1: D15.A JB15.1
N$2: JB4.2 S4.SW1
N$3: D1.A JB1.1
N$4: JA4.1 S4.SW2
N$5: JB14.2 S14.SW1
N$6: JB20.2 S20.SW1
N$7: JB32.2 S32.SW1
N$8: JB38.2 S38.SW1
N$9: JB6.2 S6.SW1
N$10: JA6.1 S6.SW2
N$11: JA8.1 S8.SW2
N$12: JB8.2 S8.SW1
N$13: JB10.2 S10.SW1
N$14: JB1.2 S1.SW1
N$15: D2.A JB2.1
N$16: JB2.2 S2.SW1
N$17: JA2.1 S2.SW2
N$18: D16.A JB16.1
N$19: JB3.2 S3.SW1
N$20: JB5.2 S5.SW1
N$21: JB7.2 S7.SW1
N$22: JB9.2 S9.SW1
N$23: JB11.2 S11.SW1
N$24: D3.A JB3.1
N$25: JB12.2 S12.SW1
N$26: D5.A JB5.1
N$27: D7.A JB7.1
N$28: JA10.1 S10.SW2
N$29: JA1.1 S1.SW2
N$30: D9.A JB9.1
N$31: D11.A JB11.1
N$32: JA3.1 S3.SW2
N$33: JA5.1 S5.SW2
N$34: JA7.1 S7.SW2
N$35: JA9.1 S9.SW2
N$36: JA11.1 S11.SW2
N$37: JA12.1 S12.SW2
N$38: JA14.1 S14.SW2
N$39: JB13.2 S13.SW1
N$40: JA13.1 S13.SW2
N$41: D14.A JB14.1
N$42: JB42.2 S42.SW1
N$43: JA42.1 S42.SW2
N$44: JB27.2 S27.SW1
N$45: JA27.1 S27.SW2
N$46: JB17.2 S17.SW1
N$47: JA17.1 S17.SW2
N$48: D24.A JB24.1
N$49: JB24.2 S24.SW1
N$50: JA24.1 S24.SW2
N$51: J22.1 J27.2
N$52: D4.A JB4.1
N$53: D6.A JB6.1
N$54: D8.A JB8.1
N$55: D10.A JB10.1
N$56: D12.A JB12.1
N$57: D13.A JB13.1
N$58: JB19.2 S19.SW1
N$59: JB25.2 S25.SW1
N$60: 1D1.9 J23.2
N$61: JB31.2 S31.SW1
N$62: JB37.2 S37.SW1
N$63: JB43.2 S43.SW1
N$64: JB26.2 S26.SW1
N$65: JB44.2 S44.SW1
N$66: JB18.2 S18.SW1
N$67: 1D1.13 J24.2
N$68: JB30.2 S30.SW1
N$69: JB36.2 S36.SW1
N$70: J24.1 J25.2
N$72: JB23.2 S23.SW1
N$73: JB29.2 S29.SW1
N$74: JB35.2 S35.SW1
N$75: JB41.2 S41.SW1
N$76: JB16.2 S16.SW1
N$77: JB22.2 S22.SW1
N$78: JB28.2 S28.SW1
N$79: JB34.2 S34.SW1
N$80: JB40.2 S40.SW1
N$81: JB46.2 S46.SW1
N$82: JB15.2 S15.SW1
N$83: JB21.2 S21.SW1
N$85: JB33.2 S33.SW1
N$86: JB39.2 S39.SW1
N$87: JB45.2 S45.SW1
N$88: JA15.1 S15.SW2
N$90: JA18.1 S18.SW2
N$91: JA20.1 S20.SW2
N$92: JA22.1 S22.SW2
N$93: JA23.1 S23.SW2
N$95: JA25.1 S25.SW2
N$96: JA26.1 S26.SW2
N$98: JA28.1 S28.SW2
N$99: JA29.1 S29.SW2
N$100: JA30.1 S30.SW2
N$101: JA31.1 S31.SW2
N$102: JA32.1 S32.SW2
N$103: JA33.1 S33.SW2
N$104: JA34.1 S34.SW2
N$105: JA35.1 S35.SW2
N$106: JA36.1 S36.SW2
N$108: JA38.1 S38.SW2
N$109: JA39.1 S39.SW2
N$110: JA40.1 S40.SW2
N$111: JA41.1 S41.SW2
N$113: JA43.1 S43.SW2
N$114: JA45.1 S45.SW2
N$115: JA46.1 S46.SW2
N$116: JA19.1 S19.SW2
N$117: JA44.1 S44.SW2
N$118: JA21.1 S21.SW2
N$119: JA16.1 S16.SW2
N$120: D17.A JB17.1
N$121: D18.A JB18.1
N$122: D19.A JB19.1
N$123: D20.A JB20.1
N$124: D21.A JB21.1
N$125: D22.A JB22.1
N$126: D23.A JB23.1
N$128: D25.A JB25.1
N$129: D26.A JB26.1
N$130: D27.A JB27.1
N$131: D28.A JB28.1
N$132: D29.A JB29.1
N$133: D30.A JB30.1
N$134: D31.A JB31.1
N$135: D32.A JB32.1
N$136: D33.A JB33.1
N$137: D34.A JB34.1
N$138: D35.A JB35.1
N$139: D36.A JB36.1
N$140: D37.A JB37.1
N$141: D38.A JB38.1
N$142: D39.A JB39.1
N$143: D40.A JB40.1
N$144: D41.A JB41.1
N$145: D42.A JB42.1
N$146: D43.A JB43.1
N$147: D44.A JB44.1
N$148: D45.A JB45.1
N$149: D46.A JB46.1
N$150: J42.1 J44.2 R11.2
N$158: 1D1.15 J43.2
N$163: 1D1.1 J27.1
N$165: 1D1.2 J28.1
N$172: 1D1.3 J29.1
N$175: J28.2 J30.1
N$176: J29.2 J31.1
N$178: J26.1 J33.2
N$181: C18.2 D47.C IC1.14
N$182: J35.2 J38.1
N$183: J36.2 J39.1
N$184: J37.2 J40.1
N$185: J31.2 J37.1
N$186: J30.2 J36.1
N$187: J22.2 J35.1
N$188: J32.2 J41.1
N$189: 1D1.11 J41.2
N$190: 1D1.12 J26.2
N$191: J34.2 J43.1
N$192: D47.A D48.C
N$193: IC1.11 J45.1 R12.2
N$194: IC1.13 J44.1
N$195: IC1.12
N$196: IC1.10
N$197: 1D0.33 R2.1
N$198: IC1.2
N$199: IC1.4
N$200: IC1.6
N$203: IC1.8
N$231: R3.1 SCROLL.A
N$232: CAPS.A R9.1
N$273: JA37.1 S37.SW2
N$284: 1D0.12 R7.1
N$390: 1D1.6 R8.2
PAD: 1D0.P$1
RD+: RN3.1
RD-: RN3.4
RESET: D91.A ICSP.5 RESET.1 RESET.2 RN1.4
SCK: ICSP.3
UCAP: C7.1
UGND [gnd]: 1D0.5 C7.2 J47.P5 L2.1 R6.2
USBID: J47.P4
UVCC: 1D0.2
VCC: 1D0.14
VCC1: 1D0.34
VIN [power]: D90.C RN1.1
VUSB: C8.+ C9.2 F1.1
XTAL1: C16.1 R4.1 Y1.1
XTAL2: C15.2 R4.2 Y1.3
XTAL3: 1D0.16 C1.2 R1.2 Y2.3
XTAL4: 1D0.17 C2.1 R1.1 Y2.1
XUSB [usbvcc]: F1.2 J47.P1